# Altium PCB PCB1.PcbDoc
Units mil, origin at the board's own origin, x right, y up, seen from the top; angles counter-clockwise.
Board outline 4040.03 x 2325.03 mil, 2 copper layers (Top Layer, Bottom Layer); 25 components, 15 nets, 55 pads, 0 vias.
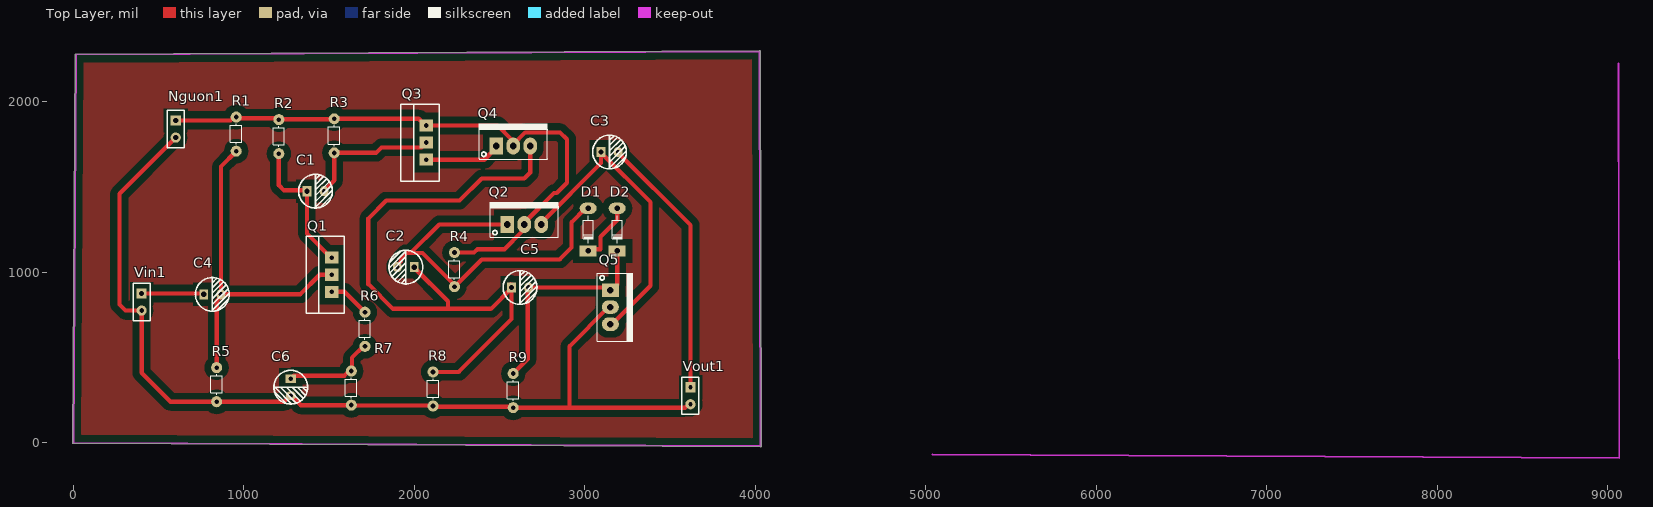
[diagram p0: Top Layer view]
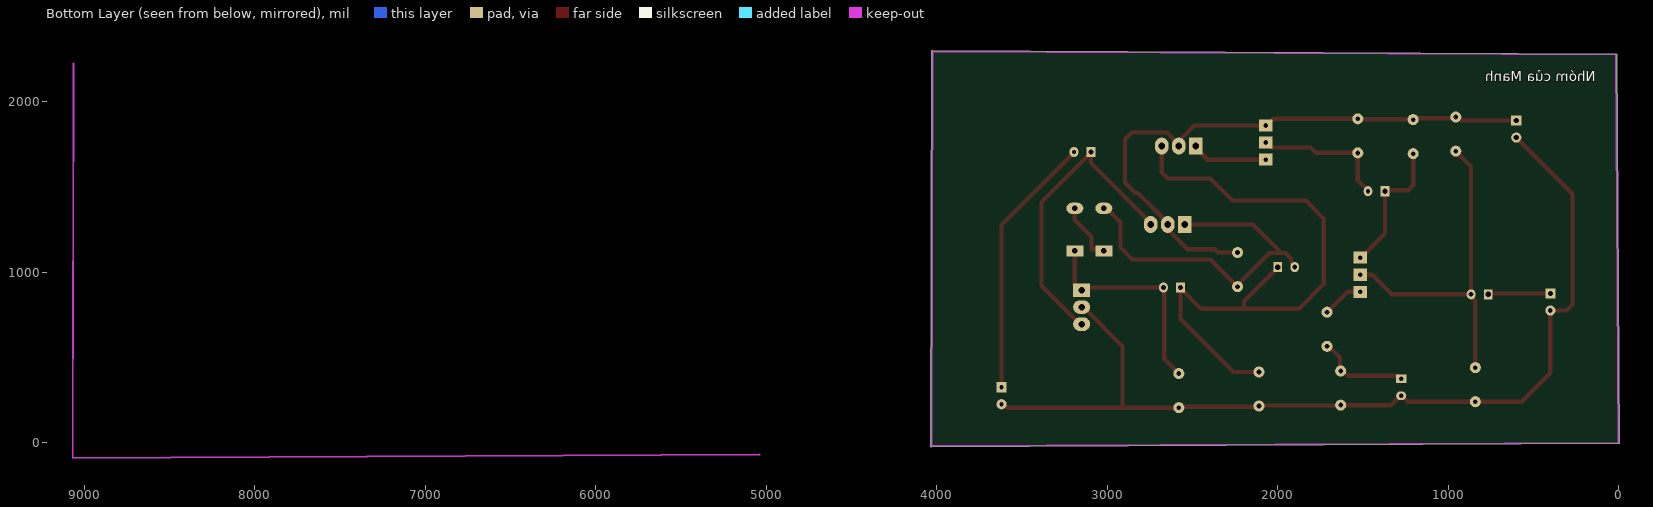
[diagram p1: Bottom Layer view, seen from below]
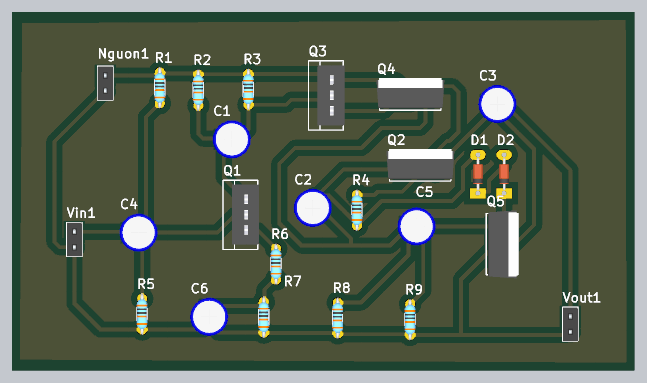
[diagram p2: 3D render of the assembled board from above, using the file's embedded part models]

## Layer stack, top to bottom
Top Solder: solder mask 0.4, Solder Resist, Dk 3.5
Top Layer: signal copper 1.4
Dielectric 1: dielectric 12.6, FR-4, Dk 4.8
Bottom Layer: signal copper 1.4
Bottom Solder: solder mask 0.4, Solder Resist, Dk 3.5

## Board outline
-0.02,-5.01 -0.01,-5.02 cw(c0,0) -5.01,0.03 9.99,2275.03 cw(c15,2275) 14.99,2280.02 4024.96,2300.01 cw(c4025,2295) 4030.02,2295.01 cw(c4025,2295) 4030.02,2295 4030.02,2295.01 4035.02,-19.99 cw(c4030,-20) 4035.02,-20 cw(c4030,-20) 4029.96,-25.01 4029.98,-25.01 4029.96,-25.01

## Design rules (kind name [scope] priority, off if disabled: settings)
Clearance [All] p1: gap=40 ignorepadtopadclearanceinfootprint=FALSE
PolygonConnect [All] p1: connectstyle=Relief reliefconductorwidth=10 reliefentries=4 polygonreliefangle="90 Angle" airgapwidth=10
RoomDefinition Sheet1 [InComponentClass('Sheet1')] p1: confinementstyle=ConfineIn formatcopy=TRUE lockcomponents=FALSE outline 5275,-1035 10315,-1035 10315,-480 5275,-480
RoutingVias [All] p1: holewidth=28 width=50 viastyle="Through Hole" minholewidth=28 minwidth=50 maxholewidth=28 maxwidth=50
SilkToSilkClearance [IsText] p1: silktosilkclearance=10
SolderMaskExpansion [All] p1: expansion=4 istentingtop=FALSE
Width [All] p1: maxlimit=50 minlimit=10 preferedwidth=40
29 further rules are at their usual default settings.

## Components (designator, comment, footprint, x,y, rotation, side; value= is the part's Value field where it differs from the comment)
C1 "100uF" "tu hoa 5mm"#1 1420,1475 r0 top
C2 "100uF" "tu hoa 5mm"#2 1950,1030 r180 top
C3 "100uF" "tu hoa 5mm"#1 3145,1705 r0 top
C4 "100uF" "tu hoa 5mm"#3 815,870 r0 top
C5 "100uF" "tu hoa 5mm"#4 2620,910 r0 top
C6 "100uF" "tu hoa 5mm"#5 1275,325 r270 top
D1 "1N4148" D0.5A 3020,1250 r90 top
D2 "1N4148" D0.5A 3190,1250 r90 top
Nguon1 "JP2" JP2-C1T#1 600,1890 r270 top
Q1 "2N222" TO-220 1515,985 r90 top value=C1815
Q2 "TIP41C" QTO-220 2545,1280 r0 top
Q3 "2N222" TO-220 2070,1760 r90 top value=C1815
Q4 "TIP41C" QTO-220 2480,1740 r0 top
Q5 "Tip 42" QTO-220 3150,895 r270 top
R1 "51k" R1/8W 955,1810 r90 top value="R1/4W - 1K"
R2 "3k9" R1/8W 1205,1795 r90 top value="R1/4W - 1K"
R3 "390" R1/8W 1530,1800 r90 top value="R1/4W - 1K"
R4 "1k" R1/8W 2235,1015 r90 top value="R1/4W - 1K"
R5 "12k" R1/8W 840,340 r90 top value="R1/4W - 1K"
R6 "82" R1/8W 1710,665 r90 top value="R1/4W - 1K"
R7 "1k" R1/8W 1630,320 r90 top value="R1/4W - 1K"
R8 "47" R1/8W 2110,315 r90 top value="R1/4W - 1K"
R9 "1k" R1/8W 2580,305 r90 top value="R1/4W - 1K"
Vin1 "JP2" JP2-C1T#2 400,875 r270 top
Vout1 "JP2" JP2-C1T#3 3620,325 r270 top

## Footprints (in the part's own frame and the unit in brackets; to place one, negate y for a bottom-side part, rotate by r counter-clockwise, add the part's x,y. Pads: shape width x height; smd on the part's side, far side on the other; paste and mask are expansions set on the pad)
D0.5A [mil] "Diode muoi, W 80mil, L 300mil"
  oval 65x100 hole 32: 1(125,0)
  rect 65x100 hole 32: 2(-125,0)
  silkscreen extent -80,-30 80,28, body extent -108,-33 108,32, height 61
JP2-C1T#1 [mm] "2 row, straight, gold plating"
  rect 1.52x1.52 hole 0.762: 1(0,0)
  round 1.52 hole 0.762: 2(2.54,0)
  silkscreen extent -1.52,-1.27 4.06,1.27, body extent -1.52,-1.25 4.06,1.25, height 8.51
JP2-C1T#2 [mm] "2 row, straight, gold plating"
  rect 1.52x1.52 hole 0.715: 1(0,0)
  round 1.52 hole 0.711: 2(2.54,0)
  silkscreen extent -1.52,-1.27 4.06,1.27, body extent -1.52,-1.25 4.06,1.25, height 8.51
JP2-C1T#3 [mm] "2 row, straight, gold plating"
  rect 1.52x1.52 hole 0.639: 1(0,0)
  round 1.52 hole 0.639: 2(2.54,0)
  silkscreen extent -1.52,-1.27 4.06,1.27, body extent -1.52,-1.25 4.06,1.25, height 8.51
QTO-220 [mil] "TO-220 - 1-2-3"
  rect 80x100 hole 39: 1(0,0)
  oval 80x100 hole 39: 2(100,0) 3(200,0)
  silkscreen extent -100,-76 300,130, body extent -119,-64 322,121, height 755
R1/8W [mil] "R 1/8W, 2 pin, 300mil"
  round 65 hole 28: 1(-100,0) 2(100,0)
  silkscreen extent -60,-32 61,34, body extent -135,-35 135,37, height 86
TO-220 [mm]
  rect 1.8x2 hole 0.717: 1(-2.54,0) 2(0,0) 3(2.54,0)
  silkscreen extent -5.71,-1.91 5.71,3.81, body extent -4.92,-2.13 4.98,2.37, height 8.08
"tu hoa 5mm"#1 [mm]
  rect 1.3x1.5 hole 0.8: 1(-1.27,0)
  oval 1.3x1.5 hole 0.648: 2(1.27,0)
  silkscreen extent -2.51,-2.51 2.51,2.51, body extent -3.12,-3.18 3.23,3.18, height 14.55
"tu hoa 5mm"#2 [mm]
  rect 1.3x1.5 hole 0.8: 1(-1.27,0)
  oval 1.3x1.5 hole 0.724: 2(1.27,0)
  silkscreen extent -2.51,-2.51 2.51,2.51, body extent -3.12,-3.18 3.23,3.18, height 14.55
"tu hoa 5mm"#3 [mm]
  rect 1.3x1.5 hole 0.8: 1(-1.27,0)
  oval 1.3x1.5 hole 0.711: 2(1.27,0)
  silkscreen extent -2.51,-2.51 2.51,2.51, body extent -3.12,-3.18 3.23,3.18, height 14.55
"tu hoa 5mm"#4 [mm]
  rect 1.3x1.5 hole 0.724: 1(-1.27,0)
  oval 1.3x1.5 hole 0.724: 2(1.27,0)
  silkscreen extent -2.51,-2.51 2.51,2.51, body extent -3.12,-3.18 3.23,3.18, height 14.55
"tu hoa 5mm"#5 [mm]
  rect 1.3x1.5 hole 0.648: 1(-1.27,0)
  oval 1.3x1.5 hole 0.648: 2(1.27,0)
  silkscreen extent -2.51,-2.51 2.51,2.51, body extent -3.12,-3.18 3.23,3.18, height 14.55

## Part data
C1 C2 C3 C4 C5 C6: library part "Tu Hoa 100uF 16V 5x11", "Cắm", Chung_Loai=Cắm, Don_Vi=Con, Ma_Hang=MH008417, So_Chan=2, Ten_Linh_Kien="Tụ Hóa 100uF 16V 5x11MM"
D1 D2: library part D0.5A, "D0.5A"
Nguon1 Vin1 Vout1: "WR-PHD 2.54 mm Angled Socket Header", Manufacturer="W¨¹rth Elektronik eiSos GmbH", partNo=613002143121, ComponentLink1 Description=Manufacturer, ComponentLink1URL=http://www.we-online.com, ComponentLink2 Description=Datasheet, ComponentLink2URL=http://katalog.we-online.de/em/datasheet/6130xx143121.pdf, Created by="Karrer Zheng", Created Date="29 March 2013", NoPins=02
Q1 Q3: "NPN 600mW, ECB"
Q2 Q4: "NPN 2W, BCE"
Q5: library part TIP42C_DIP, "Cắm", Chung_Loai=Cắm, Don_Vi=Con, Ma_Hang=MH001057, Ten_Linh_Kien="TIP42C TO220"
R1 R2 R3 R4 R5 R6 R7 R8 R9: library part R, "Resistor 1/4W"

## Nets (pads, with @x,y where several pads share a name; then routed paths per layer and width w, separated by ;. In a path a pad name is that pad's centre, name@x,y a point inside that pad or via, vN(x,y) a via of type N, cw(c..) or ccw(c..) an arc to the next point about the centre after c; other vN are vias at no path point)
GND: C6.2 Nguon1.2 Q5.2 R5.1 R7.1 R8.1 R9.1 Vin1.2 Vout1.2 | length 5673.7
  Top Layer w25: Nguon1.2 270,1460 270,810 305,775 Vin1.2 400,410 570,240 R5.1 1236.06,240 1271.06,275 C6.2 1278.94,275 1333.94,220 R7.1 1632.5,217.5 2107.5,217.5 R8.1 2115,210 2575,210 R9.1 2910,205 ; Q5.2@3160,795 Q5.2 3140,795 2910,565 2910,205 ; Vout1.2 3607.87,225 3587.87,205 2910,205
NetC1_1: C1.1 Q1.3 R2.1 | length 816.9
  Top Layer w25: R2.1 1205,1510 1235,1480 1365,1480 C1.1 1370,1226.06 1511.06,1085 Q1.3
NetC1_2: C1.2 Q3.2 R3.1 | length 814.7
  Top Layer w25: C1.2 1470,1478.94 1530,1538.94 R3.1 1774.8,1700 1806.86,1732.07 2042.07,1732.07 Q3.2
NetC2_1: C2.1 C5.1 Q4.3 R8.2 | length 3671.9
  Top Layer w25: C2.1@1993.99,1036.01 1993.99,1032.07 2196.92,829.14 2196.92,785 ; R8.2 2260,415 2570,725 C5.1@2570,906.06 ; C5.1@2556.97,923.03 C5.1@2565,931.06 ; C5.1 C5.1@2570,906.06 ; Q4.3 2680,1585 2645,1550 2395,1550 2265,1420 1835,1420 1730,1315 1730,930 1875,785 2196.92,785 ; 2196.92,785 2448.94,785 C5.1@2570,906.06
NetC2_2: C2.2 D1.1 Q2.1 R4.1 | length 2171.7
  Top Layer w25: C2.2 1900,1041.02 1921.91,1062.93 1921.91,1081.27 1952.66,1112.03 1978.09,1112.03 ; Q2.1 2146.06,1280 1978.09,1112.03 ; D1.1 3005,1375 2922.5,1292.5 2922.5,1145 2852.5,1075 2702.5,1075 2395,1075 R4.1 2235,924.36 2047.34,1112.03 1978.09,1112.03
NetC3_1: C3.1 Q2.3 Q5.3 | length 1799.4
  Top Layer w25: Q2.3 2745,1290 3095,1640 C3.1@3095,1701.06 ; C3.1 C3.1@3095,1701.06 ; Q5.3 3160,695 3385,920 3385,1411.06 C3.1@3095,1701.06
NetC3_2: C3.2 Vout1.1 | length 1556
  Top Layer w25: C3.2 3195,1701.06 3620,1276.06 Vout1.1
NetC4_1: C4.1 Vin1.1 | length 367.1
  Top Layer w25: Vin1.1 760,875 C4.1
NetC4_2: C4.2 Q1.2 R1.1 R5.2 | length 2015.3
  Top Layer w25: R5.2 840,831.27 865,856.27 C4.2 ; R1.1 865,1620 C4.2 ; Q1.2 1445,985 1330,870 C4.2
NetC5_2: C5.2 D2.2 Q5.1 R9.2 | length 1279.5
  Top Layer w25: R9.2 2665,490 2665,905 C5.2 3135,910 Q5.1 3157.5,895 3190,927.5 D2.2
NetC6_1: C6.1 R6.1 R7.2 | length 557.6
  Top Layer w25: C6.1 1293.09,393.09 1589.56,393.09 1616.47,420 R7.2 1633.53,423.53 1633.53,498.53 1700,565 R6.1
NetD1_2: D1.2 D2.1 | length 357
  Top Layer w25: D1.2 3030,1135 3092.5,1135 3092.5,1208.24 3190,1305.74 D2.1
NetNguon1_1: Nguon1.1 Q2.2 Q3.3 Q4.2 R1.2 R2.2 R3.2 R4.2 | length 3557.9
  Top Layer w25: Nguon1.1 921.47,1890 941.47,1910 R1.2 962.5,1902.5 1197.5,1902.5 R2.2 1207.5,1897.5 1527.5,1897.5 R3.2 2026.06,1900 2066.06,1860 Q3.3 2488.89,1860 2567.56,1781.33 2567.56,1752.44 Q4.2 2580,1750 2650,1820 2855,1820 2895,1780 2895,1525 2835,1465 2820,1465 2645,1290 Q2.2 2632.56,1267.56 2632.56,1238.67 2528.89,1135 2370.15,1135 2350.15,1115 R4.2
NetQ1_1: Q1.1 R6.2 | length 244.7
  Top Layer w25: Q1.1 1590,885 R6.2
NetQ3_1: Q3.1 Q4.1 | length 449
  Top Layer w25: Q3.1 2410,1660 2480,1730 Q4.1

## Polygon pours and split planes (outlines as drawn)
no net on Top Layer "NONET_L01_P003" (solid, pour order 3): 15,2275 0,2260 0,0 4010,0 4025,-15 4025,2295
no net on Top Layer "NONET_L01_P002" (solid, pour order 2): 335,-220
no net on Top Layer "NONET_L01_P001" (solid, pour order 1): 320,-220

## Keep-outs
Keep-Out Layer:
  lines w10: 5040,-70 9070,-90 9065,2225 ; 0,0 15,2275 4025,2295 4030,-20 0,0

## Silkscreen, mask and mechanical layers (free items; w line width, h text height)
Bottom Overlay:
  text "Nhóm của Manh" at 133.46,2098.61 h100